# Altium PCB Ubiwatch.PcbDoc
Units mil, origin at the board's own origin, x right, y up, seen from the top; angles counter-clockwise.
Board outline 3149.61 x 3149.61 mil, 4 copper layers (Top Layer, GND, PWR, Bottom Layer), stack 23.756 mil thick; 69 components, 42 nets, 303 pads, 0 vias.
Unrouted connection lines stored in the file: 189.
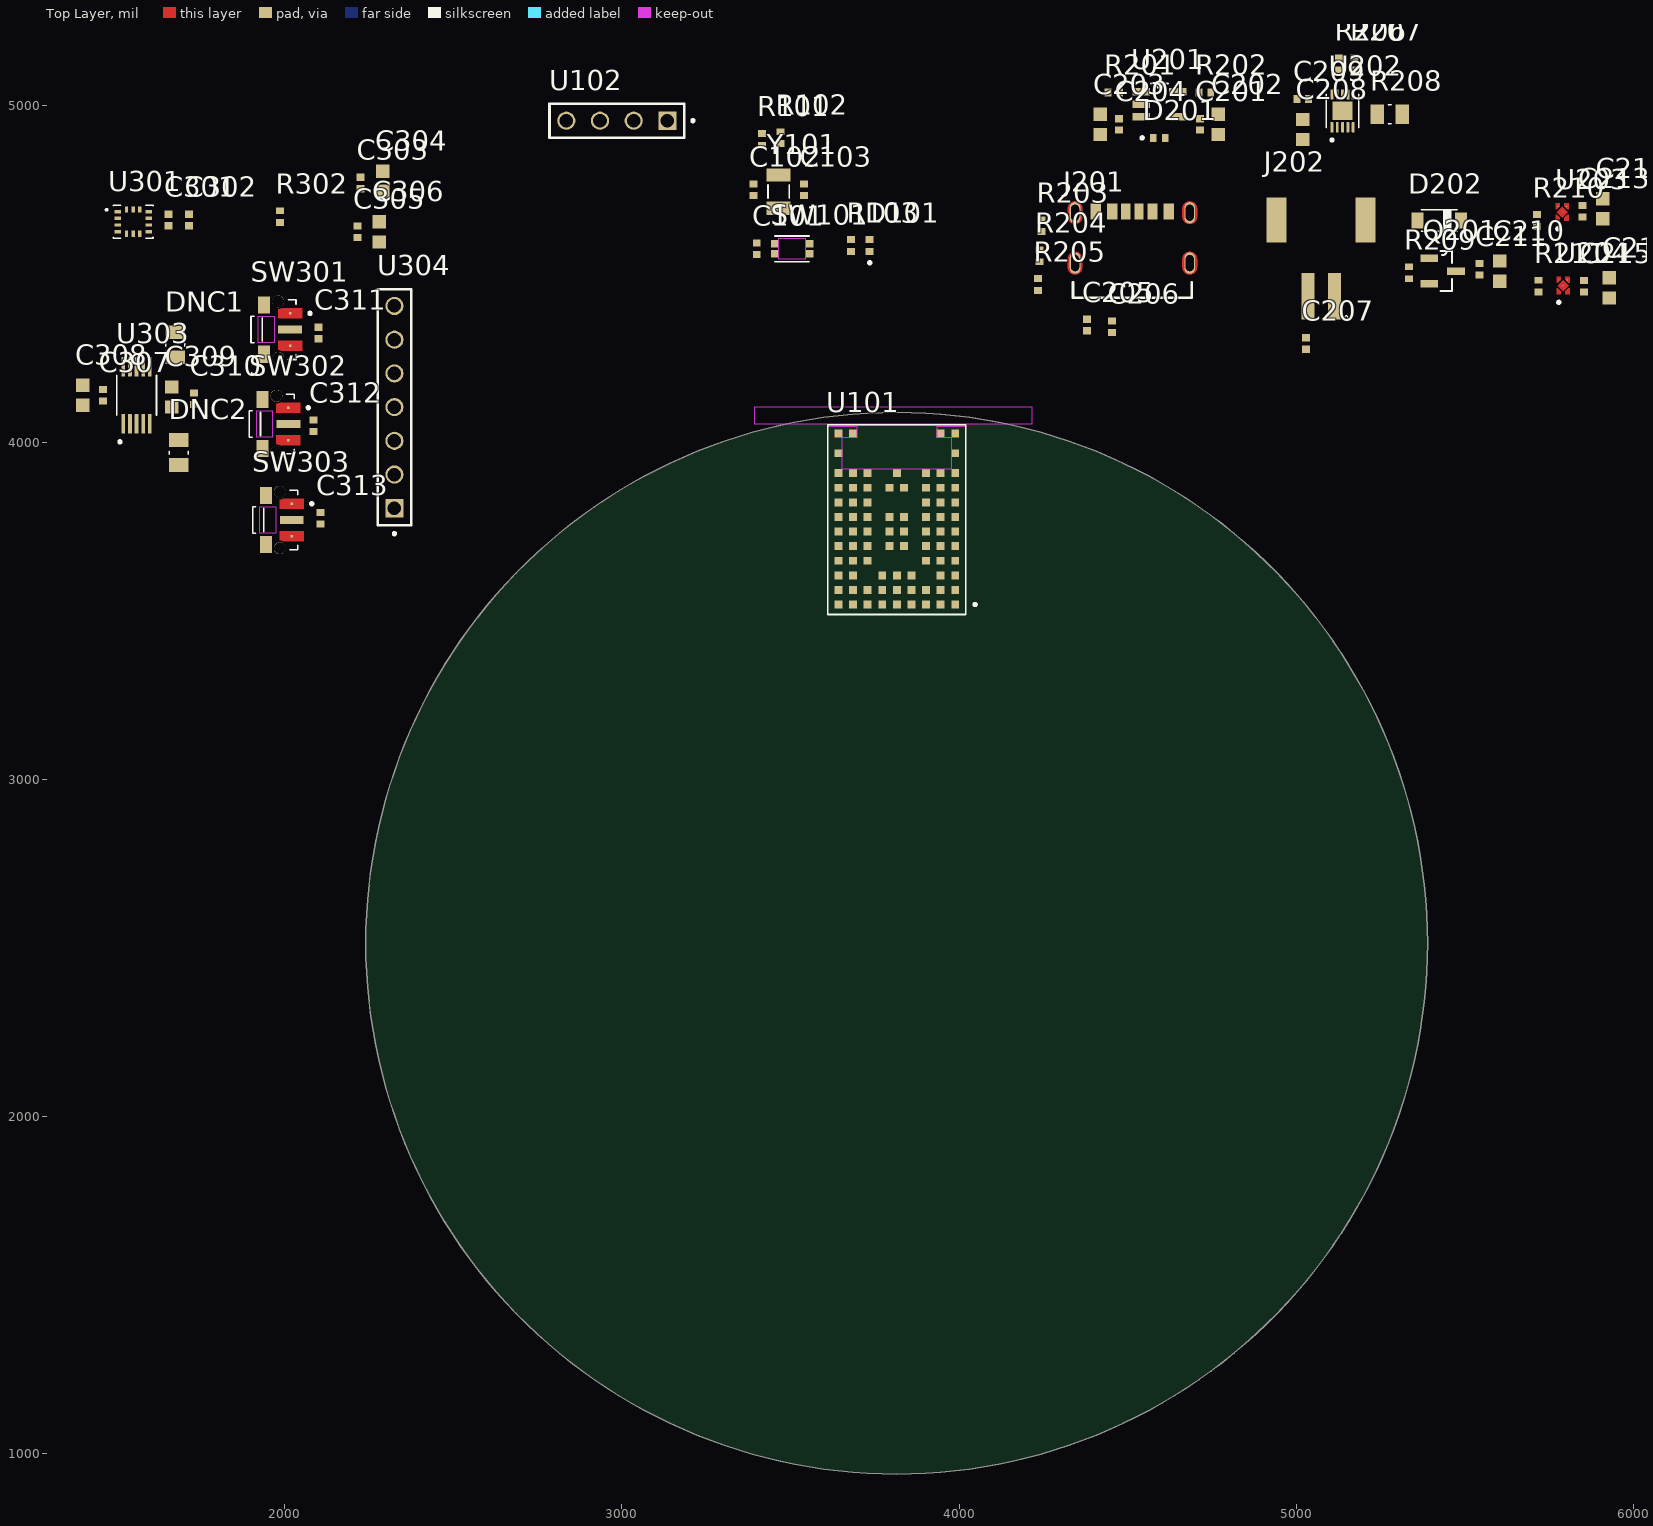
[diagram p0: Top Layer view]
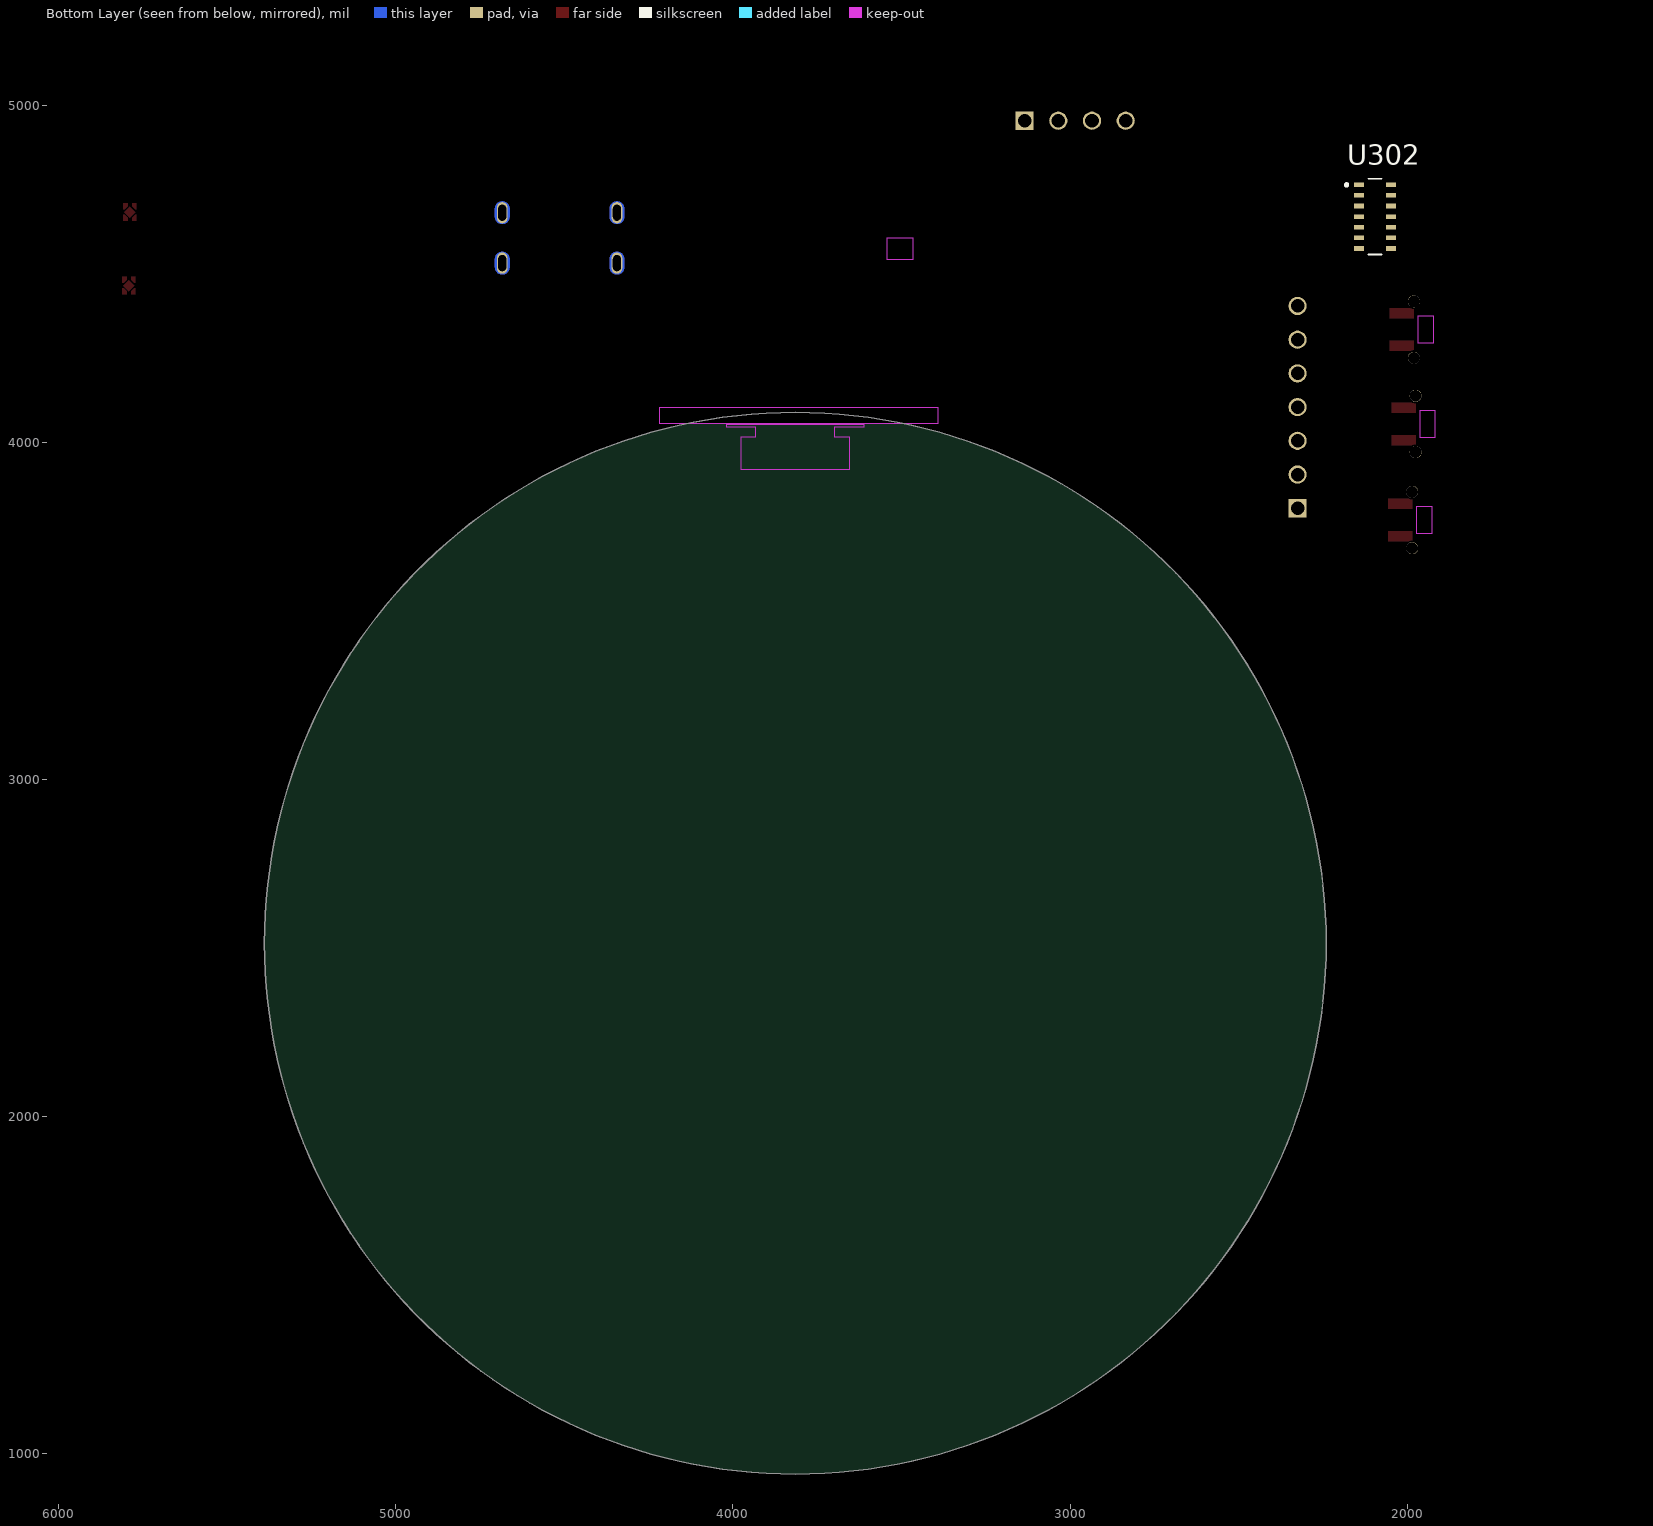
[diagram p1: Bottom Layer view, seen from below]
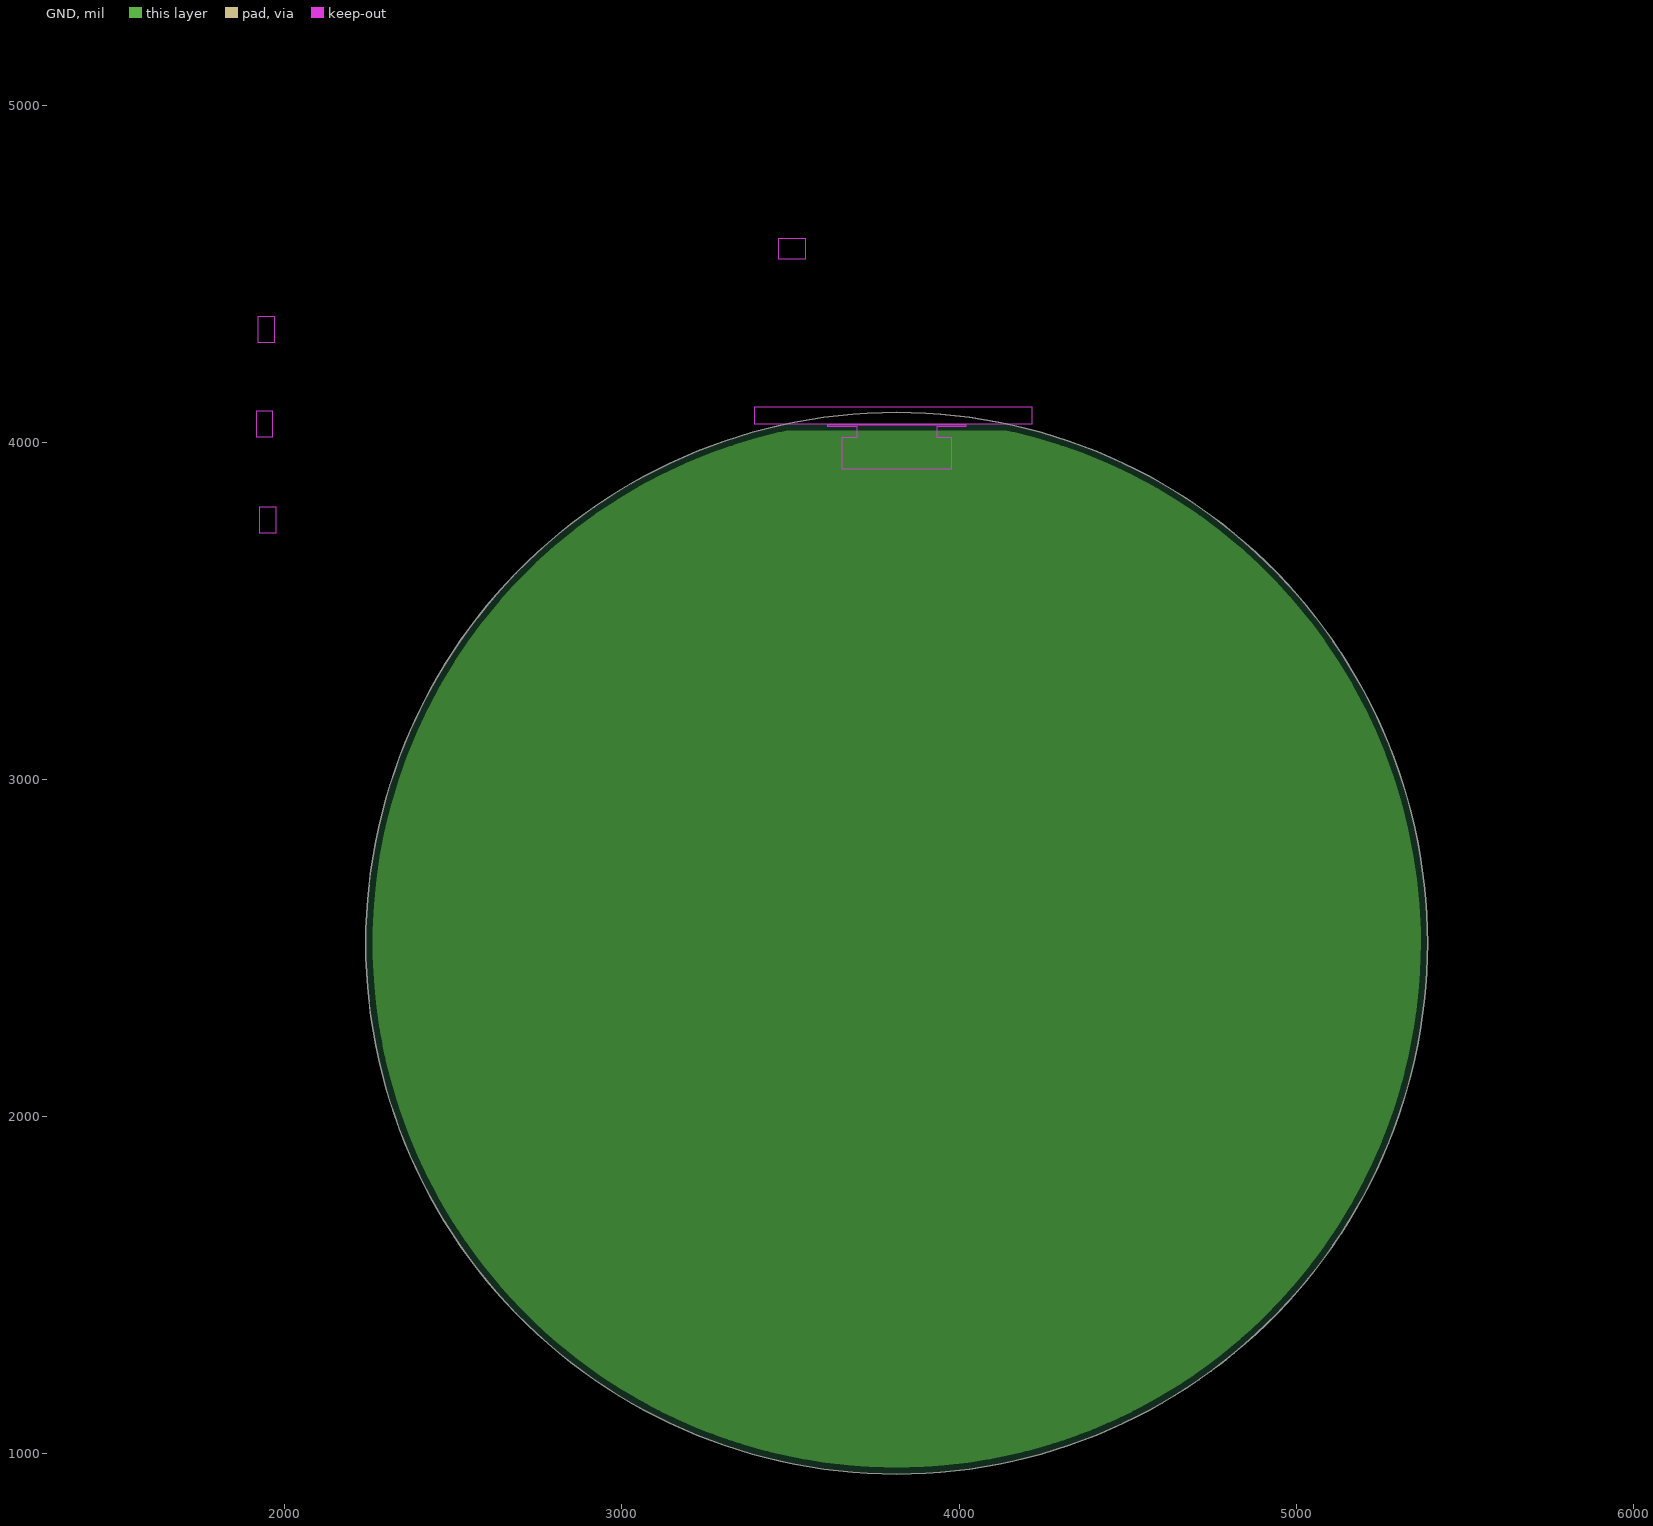
[diagram p2: GND, clearances drawn from the general rule]
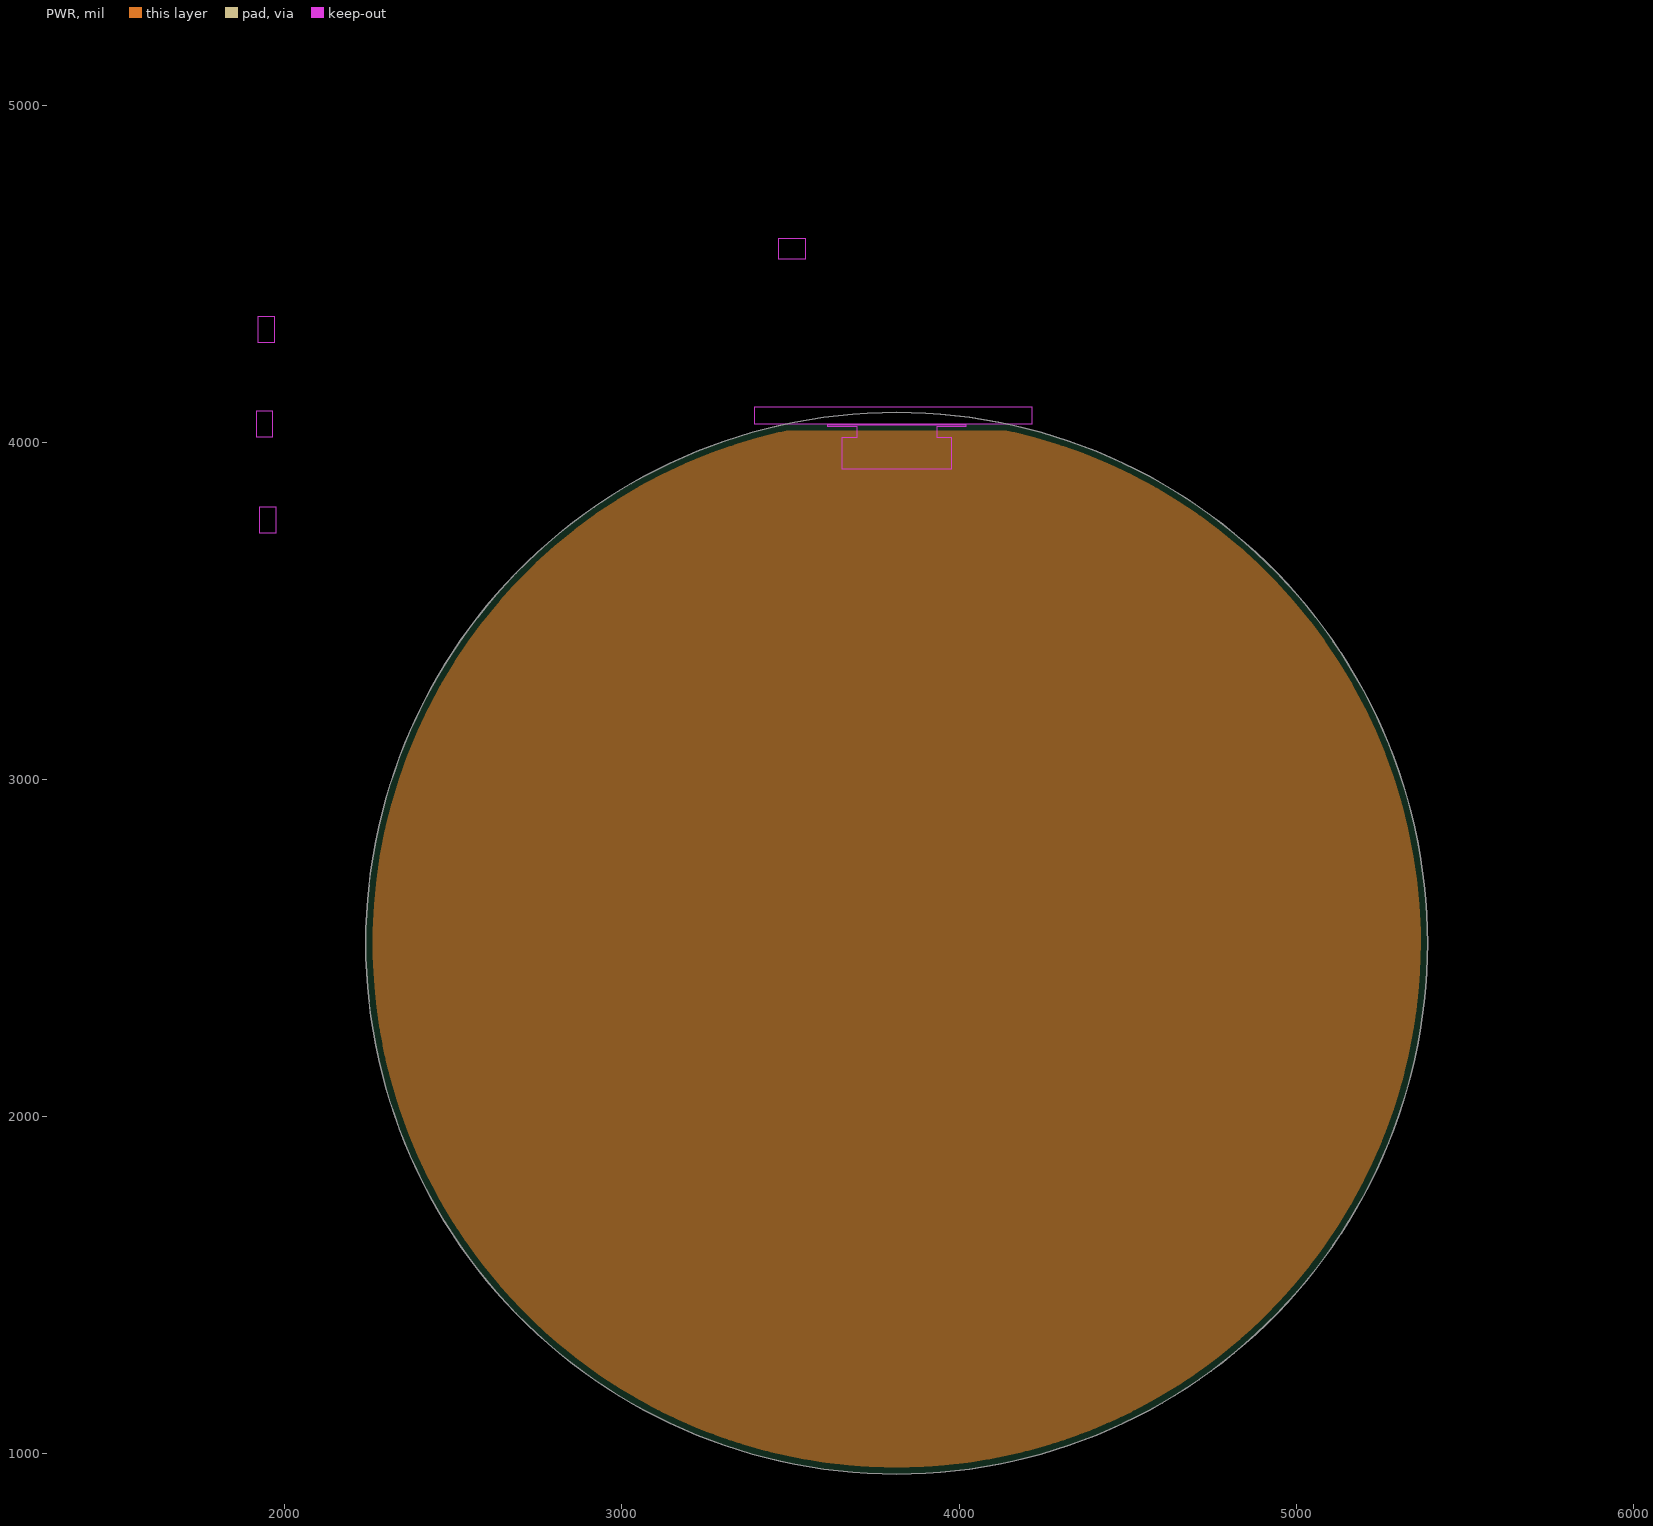
[diagram p3: PWR, clearances drawn from the general rule]

## Layer stack, top to bottom
Top Solder: solder mask 0.4, Solder Resist, Dk 3.5
Top Layer: signal copper 1.4
Dielectric 2: prepreg 2.8, PP-006, Dk 4.1
GND: plane copper 1.378
Dielectric 1: dielectric 12.6, FR-4, Dk 4.8
PWR: plane copper 1.378
Dielectric 3: prepreg 2.8, PP-006, Dk 4.1
Bottom Layer: signal copper 1.4
Bottom Solder: solder mask 0.4, Solder Resist, Dk 3.5

## Board outline
2240.2,2515 ccw(c3815,2515) 3815,940.2 ccw(c3815,2515) 5389.8,2515 ccw(c3815,2515) 3815,4089.8 ccw(c3815,2515)
cut-out: 3392.2,4055.73 4217.29,4055.73 4217.29,4104.45 3392.36,4104.45
board region "Layer Stack Region 1": 2240.2,2515 2240.2,2476.34 2243.99,2399.12 2251.57,2322.17 2262.91,2245.69 2278,2169.85 2296.78,2094.85 2319.23,2020.86 2345.28,1948.07 2374.87,1876.63 2407.92,1806.74 2444.37,1738.55 2484.12,1672.23 2527.08,1607.94 2573.14,1545.84 2622.19,1486.07 2674.11,1428.78 2728.78,1374.11 2786.07,1322.19 2845.84,1273.14 2907.94,1227.08 2972.23,1184.12 3038.55,1144.37 3106.74,1107.92 3176.63,1074.87 3248.07,1045.28 3320.86,1019.23 3394.85,996.78 3469.85,978 3545.69,962.91 3622.17,951.57 3699.12,943.99 3776.34,940.2 3815,940.2 3853.66,940.2 3930.88,943.99 4007.83,951.57 4084.31,962.91 4160.15,978 4235.15,996.78 4309.14,1019.23 4381.93,1045.28 4453.37,1074.87 4523.26,1107.92 4591.45,1144.37 4657.77,1184.12 4722.06,1227.08 4784.16,1273.14 4843.93,1322.19 4901.22,1374.11 4955.89,1428.78 5007.81,1486.07 5056.86,1545.84 5102.92,1607.94 5145.88,1672.23 5185.63,1738.55 5222.08,1806.74 5255.13,1876.63 5284.72,1948.07 5310.77,2020.86 5333.22,2094.85 5352,2169.85 5367.09,2245.69 5378.43,2322.17 5386.01,2399.12 5389.8,2476.34 5389.8,2515 5389.8,2553.66 5386.01,2630.88 5378.43,2707.83 5367.09,2784.31 5352,2860.15 5333.22,2935.15 5310.77,3009.14 5284.72,3081.93 5255.13,3153.37 5222.08,3223.26 5185.63,3291.45 5145.88,3357.77 5102.92,3422.06 5056.86,3484.16 5007.81,3543.93 4955.89,3601.22 4901.22,3655.89 4843.93,3707.81 4784.16,3756.86 4722.06,3802.92 4657.77,3845.88 4591.45,3885.63 4523.26,3922.08 4453.37,3955.13 4381.93,3984.72 4309.14,4010.77 4235.15,4033.22 4160.15,4052 4084.31,4067.09 4007.83,4078.43 3930.88,4086.01 3853.66,4089.8 3815,4089.8 3776.34,4089.8 3699.12,4086.01 3622.17,4078.43 3545.69,4067.09 3469.85,4052 3394.85,4033.22 3320.86,4010.77 3248.07,3984.72 3176.63,3955.13 3106.74,3922.08 3038.55,3885.63 2972.23,3845.88 2907.94,3802.92 2845.84,3756.86 2786.07,3707.81 2728.78,3655.89 2674.11,3601.22 2622.19,3543.93 2573.14,3484.16 2527.08,3422.06 2484.12,3357.77 2444.37,3291.45 2407.92,3223.26 2374.87,3153.37 2345.28,3081.93 2319.23,3009.14 2296.78,2935.15 2278,2860.15 2262.91,2784.31 2251.57,2707.83 2243.99,2630.88 2240.2,2553.66
board region "Default Layer Stack Region": 2240.2,2515 2240.2,2476.34 2243.99,2399.12 2251.57,2322.17 2262.91,2245.69 2278,2169.85 2296.79,2094.85 2319.23,2020.86 2345.28,1948.07 2374.87,1876.63 2407.92,1806.74 2444.37,1738.55 2484.12,1672.23 2527.08,1607.94 2573.14,1545.84 2622.19,1486.07 2674.11,1428.78 2728.78,1374.11 2786.07,1322.19 2845.84,1273.14 2907.94,1227.08 2972.23,1184.12 3038.55,1144.37 3106.74,1107.92 3176.63,1074.87 3248.07,1045.28 3320.86,1019.23 3394.85,996.79 3469.85,978 3545.69,962.91 3622.17,951.57 3699.12,943.99 3776.34,940.2 3815,940.2 3853.66,940.2 3930.88,943.99 4007.83,951.57 4084.31,962.91 4160.15,978 4235.15,996.79 4309.14,1019.23 4381.93,1045.28 4453.37,1074.87 4523.26,1107.92 4591.45,1144.37 4657.77,1184.12 4722.06,1227.08 4784.16,1273.14 4843.93,1322.19 4901.22,1374.11 4955.89,1428.78 5007.81,1486.07 5056.86,1545.84 5102.92,1607.94 5145.88,1672.23 5185.63,1738.55 5222.08,1806.74 5255.13,1876.63 5284.72,1948.07 5310.77,2020.86 5333.21,2094.85 5352,2169.85 5367.09,2245.69 5378.43,2322.17 5386.01,2399.12 5389.8,2476.34 5389.8,2515 5389.8,2553.66 5386.01,2630.88 5378.43,2707.83 5367.09,2784.31 5352,2860.15 5333.21,2935.15 5310.77,3009.14 5284.72,3081.93 5255.13,3153.37 5222.08,3223.26 5185.63,3291.45 5145.88,3357.77 5102.92,3422.06 5056.86,3484.16 5007.81,3543.93 4955.89,3601.22 4901.22,3655.89 4843.93,3707.81 4784.16,3756.86 4722.06,3802.92 4657.77,3845.88 4591.45,3885.63 4523.26,3922.08 4453.37,3955.13 4381.93,3984.72 4309.14,4010.77 4235.15,4033.21 4160.15,4052 4084.31,4067.09 4007.83,4078.43 3930.88,4086.01 3853.66,4089.8 3815,4089.8 3776.34,4089.8 3699.12,4086.01 3622.17,4078.43 3545.69,4067.09 3469.85,4052 3394.85,4033.21 3320.86,4010.77 3248.07,3984.72 3176.63,3955.13 3106.74,3922.08 3038.55,3885.63 2972.23,3845.88 2907.94,3802.92 2845.84,3756.86 2786.07,3707.81 2728.78,3655.89 2674.11,3601.22 2622.19,3543.93 2573.14,3484.16 2527.08,3422.06 2484.12,3357.77 2444.37,3291.45 2407.92,3223.26 2374.87,3153.37 2345.28,3081.93 2319.23,3009.14 2296.79,2935.15 2278,2860.14 2262.91,2784.31 2251.57,2707.83 2243.99,2630.88 2240.2,2553.66

## Design rules (kind name [scope] priority, off if disabled: settings)
BoardOutlineClearance [All] p1: gap=7.87 ignorepadtopadclearanceinfootprint=FALSE
Clearance [All] p1: gap=4 ignorepadtopadclearanceinfootprint=FALSE except(5: Arc-Via Track-Via SMDPad-Via THPad-Via Via-Via Via-Fill Via-Poly Via-Region Via-Text; 9.84: Arc-Hole Track-Hole SMDPad-Hole THPad-Hole Via-Hole Fill-Hole Poly-Hole Region-Hole Text-Hole)
ComponentClearance [All] p1: gap=4 collisioncheckmode=3 verticalgap=4 showdistances=TRUE
DiffPairsRouting [All] p1: maxlimit=4 minlimit=4 mostfreqgap=4 toplayer_minwidth=4 toplayer_maxwidth=71497.94 toplayer_prefwidth=4 bottomlayer_minwidth=4 bottomlayer_maxwidth=71497.94 bottomlayer_prefwidth=4 maxuncoupledlength=500
Height [All] p1: minheight=0 maxheight=71497.94 prefheight=500
HoleSize [All] p1: absolutevalues=TRUE maxlimit=248.03 minlimit=7.87 maxpercent=80.000 minpercent=20.000
HoleToHoleClearance [All] p1: gap=9.84 allowstackedmicrovias=FALSE
MinimumAnnularRing [All] p1: minimumring=3
MinimumSolderMaskSliver [All] p1: minsoldermaskwidth=0
PlaneClearance [All] p1: clearance=4
PlaneConnect PlaneConnectPowerPads [InPadClass('PowerPads')] p1: planeconnectstyle=Direct reliefexpansion=20 reliefentries=4 reliefconductorwidth=10 reliefairgap=10
PlaneConnect [All] p2: pad.planeconnectstyle=Relief pad.reliefexpansion=11.81 pad.reliefentries=4 pad.reliefconductorwidth=4 pad.reliefairgap=4 via.planeconnectstyle=Direct via.reliefexpansion=11.81 via.reliefentries=4 via.reliefconductorwidth=5 via.reliefairgap=5
PolygonConnect PolygonConnectPowerPads [All vs (InPadClass('PowerPads'))] p1: connectstyle=Direct reliefconductorwidth=10 reliefentries=4 polygonreliefangle="90 Angle" airgapwidth=10
PolygonConnect [All] p2: thpad.connectstyle=Relief thpad.reliefconductorwidth=4 thpad.reliefentries=4 thpad.polygonreliefangle="90 Angle" thpad.airgapwidth=4 smdpad.connectstyle=Relief smdpad.reliefconductorwidth=4 smdpad.reliefentries=4 smdpad.polygonreliefangle="90 Angle" smdpad.airgapwidth=4 via.connectstyle=Direct via.reliefconductorwidth=5 via.reliefentries=4 via.polygonreliefangle="90 Angle" via.airgapwidth=5
RoomDefinition NORA_Escape [InComponentClass('Room Definition1')] p1: confinementstyle=ConfineIn formatcopy=TRUE lockcomponents=FALSE outline 3533.53,3475.45 3533.53,4234.39 4059.78,4234.39 4059.78,3475.45
RoutingVias [All] p1: holewidth=7.87 width=17.72 viastyle="Through Hole" minholewidth=7.87 minwidth=17.72 maxholewidth=248.03 maxwidth=257.87
SilkToSilkClearance [All] p1: silktosilkclearance=0
SilkToSolderMaskClearance [IsPad] p1: minsilkscreentomaskgap=4 clearancetoexposedcopper=TRUE
SolderMaskExpansion [All] p1: expansion=2.95 istentingtop=FALSE
SupplyNets "Schematic Supply Nets_5" [InNet('VBAT')] p1: voltage=0.000
SupplyNets "Schematic Supply Nets_4" [InNet('GND')] p2: voltage=0.000
SupplyNets "Schematic Supply Nets_3" [InNet('USBC')] p3: voltage=0.000
SupplyNets "Schematic Supply Nets_2" [InNet('1.8V')] p4: voltage=0.000
SupplyNets "Schematic Supply Nets_1" [InNet('3.3V')] p5: voltage=0.000
Width Width_Escape [WithinRoom('NORA_Escape')] p1: maxlimit=5 minlimit=4 preferedwidth=4 minimp=50.000000 maximp=50.000000 favimp=50.000000
Width Width_Battery [InNetClass('BATT')] p2: maxlimit=25 minlimit=15 preferedwidth=20 minimp=50.000000 maximp=50.000000 favimp=50.000000
Width Width_Power [InNetClass('PWR')] p3: maxlimit=20 minlimit=10 preferedwidth=12 minimp=50.000000 maximp=50.000000 favimp=50.000000
Width Width_Signal [All] p4: maxlimit=8 minlimit=5 preferedwidth=6 minimp=50.000000 maximp=50.000000 favimp=50.000000
Width [All] p5: maxlimit=10 minlimit=10 preferedwidth=10 minimp=50.000000 maximp=50.000000 favimp=50.000000
20 further rules are at their usual default settings.

## Classes and differential pairs
component class "Room Definition1": U101
net class SIG: 32.768-1 32.768-2 GND MCULED NetC206_2 NetC208_2 NetC309_1 NetC310_1 NetC310_2 NetC311_1 NetC312_1 NetC313_1 NetD101_A NetD201_K NetJ201_A5 NetJ201_B5 NetR201_2 NetR202_1 NetR206_2 NetR207_2 NetR210_1 NetR211_1 NetR302_1 NetU101_D1 NetU101_D8 NetU101_E8 NetU101_F2 NetU101_H7 NetU101_H8 NetU101_J8 NetU101_J9 nRESET SCL SDA SWDCLK SWDIO VNEG
net class PWR: 1.8V 3.3V
net class BATT: USBC VBAT VSYS
component class U_Power: C201 C202 C203 C204 C205 C206 C207 C208 C209 C210 C211 C212 C213 C214 C215 D201 J201 J202 Q201 R201 R202 R203 R204 R205 R206 R207 R208 R209 R210 R211 U201 U202 U203 U204
component class U_Peripherals: C301 C302 C303 C304 C305 C306 C307 C308 C309 C310 C311 C312 C313 DNC1 DNC2 R302 SW301 SW302 SW303 U301 U302 U303 U304
component class U_Microcontroller: C101 C102 C103 D101 R101 R102 R103 SW101 U101 U102 Y101

## Components (designator, comment, footprint, x,y, rotation, side; value= is the part's Value field where it differs from the comment)
C101 "100n" 0402c 3400,4575 r90 top
C102 "18p" 0402c 3390,4750 r90 top
C103 "18p" 0402c 3540,4750 r90 top
C201 "100n" 0402c 4714.29,4944.08 r90 top
C202 "10u" 0603c 4769.29,4944.08 r90 top
C203 "10u" 0603c 4419.29,4944.08 r90 top
C204 "100n" 0402c 4474.29,4944.08 r90 top
C205 "100n" 0402c 4379.29,4349.08 r90 top
C206 "47n" 0402c 4454.29,4344.08 r90 top
C207 "100n" 0402c 5029.29,4294.08 r90 top
C208 "4u7" 0603c 5019.29,4929.08 r90 top
C209 "100n" 0402c 5019.29,5019.08 r180 top
C210 "10u" 0603c 5604.29,4509.08 r90 top
C211 "100n" 0402c 5544.29,4514.08 r90 top
C212 "10u" 0603c 5909.29,4694.08 r90 top
C213 "100n" 0402c 5849.29,4686.09 r90 top
C214 "10u" 0603c 5929.29,4458.97 r90 top
C215 "100n" 0402c 5854.29,4464.08 r90 top
C301 "100n" 0402c 1655.2,4660.47 r90 top
C302 "100n" 0402c 1715.2,4660.47 r90 top
C303 "100n" 0402c 2225.2,4770.47 r90 top
C304 "4u7" 0603c 2290.2,4775.47 r90 top
C305 "100n" 0402c 2215.2,4625.47 r90 top
C306 "10u" 0603c 2280.2,4625.47 r90 top
C307 "1u" 0402c 1460.2,4140.47 r90 top
C308 "10u" 0603c 1400.2,4140.47 r90 top
C309 "1u" 0603c 1665.2,4135.47 r90 top
C310 "100p" 0402c 1730.2,4130.47 r90 top
C311 "100n" 0402c 2100.2,4325.47 r90 top
C312 "100n" 0402c 2085.2,4050.47 r90 top
C313 "100n" 0402c 2105.2,3775.47 r90 top
D101 "LED" .LED 3735,4585 r90 top
D201 "LED" .LED 4594.29,4904.08 r0 top
D202 "MBR0520LT1G" MBR0520LT1G 5429.29,4659.08 r180 top
DNC1 "DNC" 0805r 1675.2,4290.47 r90 top
DNC2 "DNC" 0805r 1685.2,3970.47 r90 top
J201 "USB4125-GF-A" USB4125-GF-A 4514.29,4574.08 r0 top
J202 "S2B-PH-SM4-TB" S2B-PH-SM4-TB 5069.29,4594.08 r0 top
Q201 "DMG3415U-7" DMG3415U-7 5429.29,4509.08 r0 top
R101 "5k1" 0402r 3415,4900 r270 top
R102 "5k1" 0402r 3470,4905 r90 top
R103 "1k" 0402r 3680,4585 r90 top
R201 "1k" 0402r 4459.29,5039.08 r0 top
R202 "5k1" 0402r 4729.29,5039.08 r0 top
R203 "5k1" 0402r 4244.29,4644.08 r270 top
R204 "5k1" 0402r 4239.29,4554.08 r270 top
R205 "1M" 0402r 4234.29,4469.08 r270 top
R206 "10k" 0402r 5127.79,5124.08 r270 top
R207 "10k" 0402r 5172.79,5124.08 r270 top
R208 "10mR" 0805r 5277.79,4974.08 r0 top
R209 "100k" 0402r 5334.29,4504.08 r270 top
R210 "100k" 0402r 5714.29,4659.08 r90 top
R211 "100k" 0402r 5719.29,4464.08 r90 top
R302 "10k" 0402r 1985.2,4670.47 r90 top
SW101 "Button" .Button 3505,4575 r180 top
SW301 "UIButton" TL3340AF160QG 1975.2,4335.47 r270 top
SW302 "UIButton" TL3340AF160QG 1970.2,4055.47 r270 top
SW303 "UIButton" TL3340AF160QG 1980.2,3770.47 r270 top
U101 "NORA-B106" NORA-B106 3795.62,3761.77 r90 top
U102 "4-pin" 4-pin 2985,4955 r180 top
U201 "MCP73832" MCP73832 4594.29,5009.08 r0 top
U202 "MAX17055" MAX17055 5137.79,4984.08 r90 top
U203 "TPS7A0218P" TPS7A0218P 5789.29,4684.08 r90 top
U204 "TPS7A0233P" TPS7A0233P 5792.08,4466.01 r90 top
U301 "BMI270" BMI270 1550.2,4660.47 r0 top
U302 "MAX30102" MAX30102 2095.2,4670.47 r180 bottom
U303 "DRV2605L" DRV2605L 1560.2,4140.47 r90 top
U304 "7-pin" 7-pin 2325.2,4105.47 r90 top
Y101 "32.768kHz" 32.768kHz 3460,4745 r90 top

## Footprints (in the part's own frame and the unit in brackets; to place one, negate y for a bottom-side part, rotate by r counter-clockwise, add the part's x,y. Pads: shape width x height; smd on the part's side, far side on the other; paste and mask are expansions set on the pad)
4-pin [mm]
  rect 1.37x1.37 hole 1.02: 01(-3.81,0)
  round 1.37 hole 1.02: 02(-1.27,0) 03(1.27,0) 04(3.81,0)
  silkscreen extent -5.83,-1.27 5.08,1.27
7-pin [mm]
  rect 1.37x1.37 hole 1.02: 01(-7.62,0)
  round 1.37 hole 1.02: 02(-5.08,0) 03(-2.54,0) 04(0,0) 05(2.54,0) 06(5.08,0) 07(7.62,0)
  silkscreen extent -9.64,-1.27 8.89,1.27
32.768kHz [mm]
  rect 1x1.8 smd: 1(-1.25,-0.127) 2(1.25,-0.127)
  silkscreen extent -0.5,-0.93 0.5,0.67, body extent -1.6,-0.88 1.6,0.62, height 0.9
0402c [mm]
  rect 0.54x0.6 smd: 1(-0.432,0) 2(0.432,0)
  body extent -0.5,-0.25 0.5,0.25, height 0.55
0402r [mm]
  rect 0.51x0.6 smd: 1(-0.445,0) 2(0.445,0)
  body extent -0.5,-0.25 0.5,0.25, height 0.4
0603c [mm]
  rect 1x1.02 smd: 1(-0.759,0) 2(0.759,0)
  body extent -0.8,-0.4 0.8,0.4, height 1
0805r [mm]
  rect 1.04x1.47 smd: 1(-0.94,0) 2(0.94,0)
  silkscreen extent -0.1,-0.72 0.1,0.72, body extent -1,-0.63 1,0.63, height 0.7
.Button [mm]
  rect 0.55x0.55 smd paste-0.05: A1(-1.325,0.375) A2(-1.325,-0.375) B1(1.325,0.375) B2(1.325,-0.375)
  Keep-Out Layer region: 1,-0.802 -1.002,-0.802 -1.002,0.8 1,0.8
  silkscreen extent -1.3,-0.96 1.3,0.96, body extent -1.5,-0.9 1.5,0.9, height 0.63
.LED [mm]
  rect 0.5x0.6 smd: A(0.45,0) K(-0.45,0)
  silkscreen extent -1.4,-0.1 -1.2,0.1, body extent -0.5,-0.3 0.5,0.3, height 0.21
BMI270 [mm]
  rect 0.475x0.25 smd: 1(-1.162,0.623) 2(-1.162,0.123) 3(-1.162,-0.377) 4(-1.162,-0.877) 8(1.162,-0.877) 9(1.162,-0.377) 10(1.162,0.123) 11(1.162,0.623)
  rect 0.25x0.475 smd: 5(-0.5,-1.04) 6(0,-1.04) 7(0.5,-1.04) 12(0.5,0.786) 13(0,0.786) 14(-0.5,0.786)
  silkscreen extent -2.07,-1.38 1.5,1.12, body extent -1.5,-1.38 1.5,1.12, height 0.87
DMG3415U-7 [mil]
  rect 52x22 smd: 1(-35,38) 2(-35,-38) 3(45,0)
  silkscreen extent -1,-59 33,59, body extent -42,-57 52,57, height 45
DRV2605L [mm]
  rrect25% 1.47x0.28 smd paste+0 mask+0.102: 1(-2.15,1) 2(-2.15,0.5) 3(-2.15,0) 4(-2.15,-0.5) 5(-2.15,-1) 6(2.15,-1) 7(2.15,-0.5) 8(2.15,0) 9(2.15,0.5) 10(2.15,1)
  silkscreen extent -3.6,-1.5 1.5,1.5, body extent -2.45,-1.5 2.45,1.5, height 1.1
MAX17055 [mm]
  rrect25% 0.76x0.22 smd: 1(-1.23,0.8) 2(-1.23,0.4) 3(-1.23,0) 4(-1.23,-0.4) 5(-1.23,-0.8) 6(1.23,-0.8) 7(1.23,-0.4) 8(1.23,0) 9(1.23,0.4) 10(1.23,0.8)
  rect 1.4x1.5 smd paste-2: 11(0,0)
  silkscreen extent -2.29,-1.23 1.25,1.23
MAX30102 [mm]
  rect 0.75x0.35 smd: 1(-1.2,2.4) 2(-1.2,1.6) 3(-1.2,0.8) 4(-1.2,0) 5(-1.2,-0.8) 6(-1.2,-1.6) 7(-1.2,-2.4) 8(1.2,-2.4) 9(1.2,-1.6) 10(1.2,-0.8) 11(1.2,0) 12(1.2,0.8) 13(1.2,1.6) 14(1.2,2.4)
  silkscreen extent -2.25,-2.85 0.51,2.85
MBR0520LT1G [mm]
  rect 0.91x1.22 smd: A(1.762,0) C(-1.508,0)
  silkscreen extent -1.22,-0.8 1.48,0.8, body extent -1.71,-0.8 1.97,0.8, height 1.35
MCP73832 [mil]
  rect 52x22 smd: 1(-54,32) 2(-54,-5) 3(-54,-42) 4(54,-42) 5(54,32)
  silkscreen extent -25,44 25,56, body extent -57,-58 57,48, height 57
NORA-B106 [mm]
  rect 0.6x0.6 smd paste+0 mask+0.102: A1(-6.146,-4.908) A2(-6.146,-3.808) A3(-6.146,-2.708) A4(-6.146,-1.608) A5(-6.146,-0.508) A6(-6.146,0.592) A7(-6.146,1.692) A8(-6.146,2.792) A9(-6.146,3.892) B1(-5.046,-4.908) B2(-5.046,-3.808) B3(-5.046,-2.708) B4(-5.046,-1.608) B5(-5.046,-0.508) B6(-5.046,0.592) B7(-5.046,1.692) B8(-5.046,2.792) B9(-5.046,3.892) C1(-3.946,-4.908) C2(-3.946,-3.808) C4(-3.946,-1.608) C5(-3.946,-0.508) C6(-3.946,0.592) C8(-3.946,2.792) C9(-3.946,3.892) D1(-2.846,-4.908) D2(-2.846,-3.808) D3(-2.846,-2.708) D7(-2.846,1.692) D8(-2.846,2.792) D9(-2.846,3.892) E1(-1.746,-4.908) E2(-1.746,-3.808) E3(-1.746,-2.708) E4(-1.746,-1.058) E5(-1.746,0.042) E7(-1.746,1.692) E8(-1.746,2.792) E9(-1.746,3.892) F1(-0.646,-4.908) F2(-0.646,-3.808) F3(-0.646,-2.708) F4(-0.646,-1.058) F5(-0.646,0.042) F7(-0.646,1.692) F8(-0.646,2.792) F9(-0.646,3.892) G1(0.454,-4.908) G2(0.454,-3.808) G3(0.454,-2.708) G4(0.454,-1.058) G5(0.454,0.042) G7(0.454,1.692) G8(0.454,2.792) G9(0.454,3.892) H1(1.554,-4.908) H2(1.554,-3.808) H3(1.554,-2.708) H7(1.554,1.692) H8(1.554,2.792) H9(1.554,3.892) J1(2.654,-4.908) J2(2.654,-3.808) J3(2.654,-2.708) J4(2.654,-1.058) J5(2.654,0.042) J7(2.654,1.692) J8(2.654,2.792) J9(2.654,3.892) K1(3.754,-4.908) K2(3.754,-3.808) K3(3.754,-2.708) K5(3.754,-0.508) K7(3.754,1.692) K8(3.754,2.792) K9(3.754,3.892) L1(5.254,-4.908) L9(5.254,3.892) M1(6.754,-4.908) M2(6.754,-3.808) M8(6.754,2.792) M9(6.754,3.892)
  Keep-Out Layer region: 7.404,-5.708 7.254,-5.708 7.254,-3.508 6.454,-3.508 6.454,-4.608 4.054,-4.608 4.054,3.592 6.454,3.592 6.454,2.492 7.254,2.492 7.254,4.692 7.404,4.692
  Keep-Out Layer region: 7.404,-5.708 7.254,-5.708 7.254,-3.508 6.454,-3.508 6.454,-4.608 4.054,-4.608 4.054,3.592 6.454,3.592 6.454,2.492 7.254,2.492 7.254,4.692 7.404,4.692
  silkscreen extent -6.9,-6.51 7.4,4.69, body extent -6.9,-5.71 7.4,4.69, height 1.8
S2B-PH-SM4-TB [mm]
  rect 1x3.5 smd: 1(1.127,-4.064) 2(-0.873,-4.064)
  rect 1.5x3.4 smd: P1(3.477,1.686) P2(-3.223,1.686)
  silkscreen extent 1.9,-5.79 2.15,-5.54, body extent -3.82,-4.06 4.08,4.54, height 5.5
TL3340AF160QG [mm]
  rect 0.2x0.2 smd paste-1 mask+0: 1(-1.225,1.027) 3(1.225,1.027)
  rect 0.6x1.8 smd: 2(0,1.027)
  rect 1.3x0.9 smd: S1(-1.85,-0.923) S2(1.85,-0.923)
  round 0.9 hole 0.9 unplated: ""(-2.125,0.127) ""(2.125,0.127)
  Top Layer region: -0.85,0.127 -1.525,0.127 -1.525,0.136 -1.525,0.154 -1.526,0.172 -1.529,0.19 -1.53,0.198 -1.53,0.198 -1.531,0.207 -1.533,0.225 -1.536,0.243 -1.54,0.261 -1.543,0.27 -1.545,0.28 -1.551,0.302 -1.557,0.323 -1.565,0.344 -1.569,0.354 -1.572,0.363 -1.579,0.379 -1.587,0.395 -1.595,0.41 -1.6,0.417 -1.6,0.427 -1.6,1.927 -0.85,1.927
  Top Layer region: 1.6,0.427 1.6,0.417 1.595,0.41 1.587,0.395 1.579,0.379 1.572,0.363 1.569,0.354 1.565,0.344 1.557,0.323 1.551,0.302 1.545,0.28 1.543,0.27 1.54,0.261 1.536,0.243 1.533,0.225 1.531,0.207 1.53,0.198 1.53,0.198 1.529,0.19 1.526,0.172 1.525,0.154 1.525,0.136 1.525,0.127 0.85,0.127 0.85,1.927 1.6,1.927
  Keep-Out Layer region: 1,-1.373 -1,-1.373 -1,-0.173 1,-0.173
  silkscreen extent -2.25,-1.92 2.25,2.63, body extent -2.25,-1.92 2.25,1.74, height 3.3
TPS7A0218P [mm]
  rect 0.05x0.05 smd paste-1 mask+0: 1(-0.43,0.325) 2(-0.43,-0.325) 3(0.43,-0.325) 4(0.43,0.325) 5(0,0)
  Top Layer region: 0.41,0 0,-0.41 -0.41,0 0,0.41
  Top Layer region: -0.2,-0.4 -0.2,-0.48 -0.66,-0.48 -0.66,-0.17 -0.43,-0.17
  Top Layer region: -0.2,0.4 -0.43,0.17 -0.66,0.17 -0.66,0.48 -0.2,0.48
  Top Layer region: 0.66,-0.48 0.2,-0.48 0.2,-0.4 0.43,-0.17 0.66,-0.17
  Top Layer region: 0.66,0.17 0.43,0.17 0.2,0.4 0.2,0.48 0.66,0.48
  silkscreen extent -1.36,0.23 -1.16,0.42, body extent -0.5,-0.5 0.5,0.5, height 0.4
TPS7A0233P [mm]
  rect 0.05x0.05 smd paste-1 mask+0: 1(-0.43,0.325) 2(-0.43,-0.325) 3(0.43,-0.325) 4(0.43,0.325) 5(0,0)
  Top Layer region: 0.41,0 0,-0.41 -0.41,0 0,0.41
  Top Layer region: -0.2,-0.4 -0.2,-0.48 -0.66,-0.48 -0.66,-0.17 -0.43,-0.17
  Top Layer region: -0.2,0.4 -0.43,0.17 -0.66,0.17 -0.66,0.48 -0.2,0.48
  Top Layer region: 0.66,-0.48 0.2,-0.48 0.2,-0.4 0.43,-0.17 0.66,-0.17
  Top Layer region: 0.66,0.17 0.43,0.17 0.2,0.4 0.2,0.48 0.66,0.48
  silkscreen extent -1.36,0.23 -1.16,0.42, body extent -0.5,-0.5 0.5,0.5, height 0.4
USB4125-GF-A [mm]
  rect 0.7x1.2 smd: A5(-0.5,2.826) B5(0.5,2.826)
  rect 0.76x1.2 smd: A9(1.52,2.826) B9(-1.52,2.826)
  rect 0.8x1.2 smd: A12(2.75,2.826) B12(-2.75,2.826)
  oval 0.8x1.6 hole 0.6 slot 1.2 at 90 deg mask+0: S1(-4.32,2.746) S2(4.32,2.746) S3(-4.32,-1.054) S4(4.32,-1.054)
  Top Layer region: 4.349,3.595 4.377,3.593 4.406,3.589 4.434,3.584 4.462,3.577 4.49,3.569 4.517,3.559 4.544,3.548 4.57,3.536 4.595,3.522 4.62,3.507 4.643,3.491 4.666,3.473 4.688,3.455 4.709,3.435 4.729,3.414 4.747,3.392 4.765,3.369 4.781,3.346 4.796,3.321 4.81,3.296 4.822,3.27 4.833,3.243 4.843,3.216 4.851,3.188 4.858,3.16 4.863,3.132 4.867,3.103 4.869,3.075 4.87,3.046 4.87,2.446 4.869,2.417 4.867,2.389 4.863,2.36 4.858,2.332 4.851,2.304 4.843,2.276 4.833,2.249 4.822,2.222 4.81,2.196 4.796,2.171 4.781,2.146 4.765,2.123 4.747,2.1 4.729,2.078 4.709,2.057 4.688,2.037 4.666,2.019 4.643,2.001 4.62,1.985 4.595,1.97 4.57,1.956 4.544,1.944 4.517,1.933 4.49,1.923 4.462,1.915 4.434,1.908 4.406,1.903 4.377,1.899 4.349,1.897 4.32,1.896 4.291,1.897 4.263,1.899 4.234,1.903 4.206,1.908 4.178,1.915 4.15,1.923 4.123,1.933 4.096,1.944 4.07,1.956 4.045,1.97 4.02,1.985 3.997,2.001 3.974,2.019 3.952,2.037 3.931,2.057 3.911,2.078 3.893,2.1 3.875,2.123 3.859,2.146 3.844,2.171 3.83,2.196 3.818,2.222 3.807,2.249 3.797,2.276 3.789,2.304 3.782,2.332 3.777,2.36 3.773,2.389 3.771,2.417 3.77,2.446 3.77,3.046 3.771,3.075 3.773,3.103 3.777,3.132 3.782,3.16 3.789,3.188 3.797,3.216 3.807,3.243 3.818,3.27 3.83,3.296 3.844,3.321 3.859,3.346 3.875,3.369 3.893,3.392 3.911,3.414 3.931,3.435 3.952,3.455 3.974,3.473 3.997,3.491 4.02,3.507 4.045,3.522 4.07,3.536 4.096,3.548 4.123,3.559 4.15,3.569 4.178,3.577 4.206,3.584 4.234,3.589 4.263,3.593 4.291,3.595 4.32,3.596
  Top Layer region: -4.291,3.595 -4.263,3.593 -4.234,3.589 -4.206,3.584 -4.178,3.577 -4.15,3.569 -4.123,3.559 -4.096,3.548 -4.07,3.536 -4.045,3.522 -4.02,3.507 -3.997,3.491 -3.974,3.473 -3.952,3.455 -3.931,3.435 -3.911,3.414 -3.893,3.392 -3.875,3.369 -3.859,3.346 -3.844,3.321 -3.83,3.296 -3.818,3.27 -3.807,3.243 -3.797,3.216 -3.789,3.188 -3.782,3.16 -3.777,3.132 -3.773,3.103 -3.771,3.075 -3.77,3.046 -3.77,2.446 -3.771,2.417 -3.773,2.389 -3.777,2.36 -3.782,2.332 -3.789,2.304 -3.797,2.276 -3.807,2.249 -3.818,2.222 -3.83,2.196 -3.844,2.171 -3.859,2.146 -3.875,2.123 -3.893,2.1 -3.911,2.078 -3.931,2.057 -3.952,2.037 -3.974,2.019 -3.997,2.001 -4.02,1.985 -4.045,1.97 -4.07,1.956 -4.096,1.944 -4.123,1.933 -4.15,1.923 -4.178,1.915 -4.206,1.908 -4.234,1.903 -4.263,1.899 -4.291,1.897 -4.32,1.896 -4.349,1.897 -4.377,1.899 -4.406,1.903 -4.434,1.908 -4.462,1.915 -4.49,1.923 -4.517,1.933 -4.544,1.944 -4.57,1.956 -4.595,1.97 -4.62,1.985 -4.643,2.001 -4.666,2.019 -4.688,2.037 -4.709,2.057 -4.729,2.078 -4.747,2.1 -4.765,2.123 -4.781,2.146 -4.796,2.171 -4.81,2.196 -4.822,2.222 -4.833,2.249 -4.843,2.276 -4.851,2.304 -4.858,2.332 -4.863,2.36 -4.867,2.389 -4.869,2.417 -4.87,2.446 -4.87,3.046 -4.869,3.075 -4.867,3.103 -4.863,3.132 -4.858,3.16 -4.851,3.188 -4.843,3.216 -4.833,3.243 -4.822,3.27 -4.81,3.296 -4.796,3.321 -4.781,3.346 -4.765,3.369 -4.747,3.392 -4.729,3.414 -4.709,3.435 -4.688,3.455 -4.666,3.473 -4.643,3.491 -4.62,3.507 -4.595,3.522 -4.57,3.536 -4.544,3.548 -4.517,3.559 -4.49,3.569 -4.462,3.577 -4.434,3.584 -4.406,3.589 -4.377,3.593 -4.349,3.595 -4.32,3.596
  Top Layer region: 4.349,-0.205 4.377,-0.207 4.406,-0.211 4.434,-0.216 4.462,-0.223 4.49,-0.231 4.517,-0.241 4.544,-0.252 4.57,-0.264 4.595,-0.278 4.62,-0.293 4.643,-0.309 4.666,-0.327 4.688,-0.345 4.709,-0.365 4.729,-0.386 4.747,-0.408 4.765,-0.431 4.781,-0.454 4.796,-0.479 4.81,-0.504 4.822,-0.53 4.833,-0.557 4.843,-0.584 4.851,-0.612 4.858,-0.64 4.863,-0.668 4.867,-0.697 4.869,-0.725 4.87,-0.754 4.87,-1.354 4.869,-1.383 4.867,-1.411 4.863,-1.44 4.858,-1.468 4.851,-1.496 4.843,-1.524 4.833,-1.551 4.822,-1.578 4.81,-1.604 4.796,-1.629 4.781,-1.654 4.765,-1.677 4.747,-1.7 4.729,-1.722 4.709,-1.743 4.688,-1.763 4.666,-1.781 4.643,-1.799 4.62,-1.815 4.595,-1.83 4.57,-1.844 4.544,-1.856 4.517,-1.867 4.49,-1.877 4.462,-1.885 4.434,-1.892 4.406,-1.897 4.377,-1.901 4.349,-1.903 4.32,-1.904 4.291,-1.903 4.263,-1.901 4.234,-1.897 4.206,-1.892 4.178,-1.885 4.15,-1.877 4.123,-1.867 4.096,-1.856 4.07,-1.844 4.045,-1.83 4.02,-1.815 3.997,-1.799 3.974,-1.781 3.952,-1.763 3.931,-1.743 3.911,-1.722 3.893,-1.7 3.875,-1.677 3.859,-1.654 3.844,-1.629 3.83,-1.604 3.818,-1.578 3.807,-1.551 3.797,-1.524 3.789,-1.496 3.782,-1.468 3.777,-1.44 3.773,-1.411 3.771,-1.383 3.77,-1.354 3.77,-0.754 3.771,-0.725 3.773,-0.697 3.777,-0.668 3.782,-0.64 3.789,-0.612 3.797,-0.584 3.807,-0.557 3.818,-0.53 3.83,-0.504 3.844,-0.479 3.859,-0.454 3.875,-0.431 3.893,-0.408 3.911,-0.386 3.931,-0.365 3.952,-0.345 3.974,-0.327 3.997,-0.309 4.02,-0.293 4.045,-0.278 4.07,-0.264 4.096,-0.252 4.123,-0.241 4.15,-0.231 4.178,-0.223 4.206,-0.216 4.234,-0.211 4.263,-0.207 4.291,-0.205 4.32,-0.204
  Top Layer region: -4.291,-0.205 -4.263,-0.207 -4.234,-0.211 -4.206,-0.216 -4.178,-0.223 -4.15,-0.231 -4.123,-0.241 -4.096,-0.252 -4.07,-0.264 -4.045,-0.278 -4.02,-0.293 -3.997,-0.309 -3.974,-0.327 -3.952,-0.345 -3.931,-0.365 -3.911,-0.386 -3.893,-0.408 -3.875,-0.431 -3.859,-0.454 -3.844,-0.479 -3.83,-0.504 -3.818,-0.53 -3.807,-0.557 -3.797,-0.584 -3.789,-0.612 -3.782,-0.64 -3.777,-0.668 -3.773,-0.697 -3.771,-0.725 -3.77,-0.754 -3.77,-1.354 -3.771,-1.383 -3.773,-1.411 -3.777,-1.44 -3.782,-1.468 -3.789,-1.496 -3.797,-1.524 -3.807,-1.551 -3.818,-1.578 -3.83,-1.604 -3.844,-1.629 -3.859,-1.654 -3.875,-1.677 -3.893,-1.7 -3.911,-1.722 -3.931,-1.743 -3.952,-1.763 -3.974,-1.781 -3.997,-1.799 -4.02,-1.815 -4.045,-1.83 -4.07,-1.844 -4.096,-1.856 -4.123,-1.867 -4.15,-1.877 -4.178,-1.885 -4.206,-1.892 -4.234,-1.897 -4.263,-1.901 -4.291,-1.903 -4.32,-1.904 -4.349,-1.903 -4.377,-1.901 -4.406,-1.897 -4.434,-1.892 -4.462,-1.885 -4.49,-1.877 -4.517,-1.867 -4.544,-1.856 -4.57,-1.844 -4.595,-1.83 -4.62,-1.815 -4.643,-1.799 -4.666,-1.781 -4.688,-1.763 -4.709,-1.743 -4.729,-1.722 -4.747,-1.7 -4.765,-1.677 -4.781,-1.654 -4.796,-1.629 -4.81,-1.604 -4.822,-1.578 -4.833,-1.551 -4.843,-1.524 -4.851,-1.496 -4.858,-1.468 -4.863,-1.44 -4.867,-1.411 -4.869,-1.383 -4.87,-1.354 -4.87,-0.754 -4.869,-0.725 -4.867,-0.697 -4.863,-0.668 -4.858,-0.64 -4.851,-0.612 -4.843,-0.584 -4.833,-0.557 -4.822,-0.53 -4.81,-0.504 -4.796,-0.479 -4.781,-0.454 -4.765,-0.431 -4.747,-0.408 -4.729,-0.386 -4.709,-0.365 -4.688,-0.345 -4.666,-0.327 -4.643,-0.309 -4.62,-0.293 -4.595,-0.278 -4.57,-0.264 -4.544,-0.252 -4.517,-0.241 -4.49,-0.231 -4.462,-0.223 -4.434,-0.216 -4.406,-0.211 -4.377,-0.207 -4.349,-0.205 -4.32,-0.204
  Bottom Layer region: 4.349,3.595 4.377,3.593 4.406,3.589 4.434,3.584 4.462,3.577 4.49,3.569 4.517,3.559 4.544,3.548 4.57,3.536 4.595,3.522 4.62,3.507 4.643,3.491 4.666,3.473 4.688,3.455 4.709,3.435 4.729,3.414 4.747,3.392 4.765,3.369 4.781,3.346 4.796,3.321 4.81,3.296 4.822,3.27 4.833,3.243 4.843,3.216 4.851,3.188 4.858,3.16 4.863,3.132 4.867,3.103 4.869,3.075 4.87,3.046 4.87,2.446 4.869,2.417 4.867,2.389 4.863,2.36 4.858,2.332 4.851,2.304 4.843,2.276 4.833,2.249 4.822,2.222 4.81,2.196 4.796,2.171 4.781,2.146 4.765,2.123 4.747,2.1 4.729,2.078 4.709,2.057 4.688,2.037 4.666,2.019 4.643,2.001 4.62,1.985 4.595,1.97 4.57,1.956 4.544,1.944 4.517,1.933 4.49,1.923 4.462,1.915 4.434,1.908 4.406,1.903 4.377,1.899 4.349,1.897 4.32,1.896 4.291,1.897 4.263,1.899 4.234,1.903 4.206,1.908 4.178,1.915 4.15,1.923 4.123,1.933 4.096,1.944 4.07,1.956 4.045,1.97 4.02,1.985 3.997,2.001 3.974,2.019 3.952,2.037 3.931,2.057 3.911,2.078 3.893,2.1 3.875,2.123 3.859,2.146 3.844,2.171 3.83,2.196 3.818,2.222 3.807,2.249 3.797,2.276 3.789,2.304 3.782,2.332 3.777,2.36 3.773,2.389 3.771,2.417 3.77,2.446 3.77,3.046 3.771,3.075 3.773,3.103 3.777,3.132 3.782,3.16 3.789,3.188 3.797,3.216 3.807,3.243 3.818,3.27 3.83,3.296 3.844,3.321 3.859,3.346 3.875,3.369 3.893,3.392 3.911,3.414 3.931,3.435 3.952,3.455 3.974,3.473 3.997,3.491 4.02,3.507 4.045,3.522 4.07,3.536 4.096,3.548 4.123,3.559 4.15,3.569 4.178,3.577 4.206,3.584 4.234,3.589 4.263,3.593 4.291,3.595 4.32,3.596
  Bottom Layer region: -4.291,3.595 -4.263,3.593 -4.234,3.589 -4.206,3.584 -4.178,3.577 -4.15,3.569 -4.123,3.559 -4.096,3.548 -4.07,3.536 -4.045,3.522 -4.02,3.507 -3.997,3.491 -3.974,3.473 -3.952,3.455 -3.931,3.435 -3.911,3.414 -3.893,3.392 -3.875,3.369 -3.859,3.346 -3.844,3.321 -3.83,3.296 -3.818,3.27 -3.807,3.243 -3.797,3.216 -3.789,3.188 -3.782,3.16 -3.777,3.132 -3.773,3.103 -3.771,3.075 -3.77,3.046 -3.77,2.446 -3.771,2.417 -3.773,2.389 -3.777,2.36 -3.782,2.332 -3.789,2.304 -3.797,2.276 -3.807,2.249 -3.818,2.222 -3.83,2.196 -3.844,2.171 -3.859,2.146 -3.875,2.123 -3.893,2.1 -3.911,2.078 -3.931,2.057 -3.952,2.037 -3.974,2.019 -3.997,2.001 -4.02,1.985 -4.045,1.97 -4.07,1.956 -4.096,1.944 -4.123,1.933 -4.15,1.923 -4.178,1.915 -4.206,1.908 -4.234,1.903 -4.263,1.899 -4.291,1.897 -4.32,1.896 -4.349,1.897 -4.377,1.899 -4.406,1.903 -4.434,1.908 -4.462,1.915 -4.49,1.923 -4.517,1.933 -4.544,1.944 -4.57,1.956 -4.595,1.97 -4.62,1.985 -4.643,2.001 -4.666,2.019 -4.688,2.037 -4.709,2.057 -4.729,2.078 -4.747,2.1 -4.765,2.123 -4.781,2.146 -4.796,2.171 -4.81,2.196 -4.822,2.222 -4.833,2.249 -4.843,2.276 -4.851,2.304 -4.858,2.332 -4.863,2.36 -4.867,2.389 -4.869,2.417 -4.87,2.446 -4.87,3.046 -4.869,3.075 -4.867,3.103 -4.863,3.132 -4.858,3.16 -4.851,3.188 -4.843,3.216 -4.833,3.243 -4.822,3.27 -4.81,3.296 -4.796,3.321 -4.781,3.346 -4.765,3.369 -4.747,3.392 -4.729,3.414 -4.709,3.435 -4.688,3.455 -4.666,3.473 -4.643,3.491 -4.62,3.507 -4.595,3.522 -4.57,3.536 -4.544,3.548 -4.517,3.559 -4.49,3.569 -4.462,3.577 -4.434,3.584 -4.406,3.589 -4.377,3.593 -4.349,3.595 -4.32,3.596
  Bottom Layer region: 4.349,-0.205 4.377,-0.207 4.406,-0.211 4.434,-0.216 4.462,-0.223 4.49,-0.231 4.517,-0.241 4.544,-0.252 4.57,-0.264 4.595,-0.278 4.62,-0.293 4.643,-0.309 4.666,-0.327 4.688,-0.345 4.709,-0.365 4.729,-0.386 4.747,-0.408 4.765,-0.431 4.781,-0.454 4.796,-0.479 4.81,-0.504 4.822,-0.53 4.833,-0.557 4.843,-0.584 4.851,-0.612 4.858,-0.64 4.863,-0.668 4.867,-0.697 4.869,-0.725 4.87,-0.754 4.87,-1.354 4.869,-1.383 4.867,-1.411 4.863,-1.44 4.858,-1.468 4.851,-1.496 4.843,-1.524 4.833,-1.551 4.822,-1.578 4.81,-1.604 4.796,-1.629 4.781,-1.654 4.765,-1.677 4.747,-1.7 4.729,-1.722 4.709,-1.743 4.688,-1.763 4.666,-1.781 4.643,-1.799 4.62,-1.815 4.595,-1.83 4.57,-1.844 4.544,-1.856 4.517,-1.867 4.49,-1.877 4.462,-1.885 4.434,-1.892 4.406,-1.897 4.377,-1.901 4.349,-1.903 4.32,-1.904 4.291,-1.903 4.263,-1.901 4.234,-1.897 4.206,-1.892 4.178,-1.885 4.15,-1.877 4.123,-1.867 4.096,-1.856 4.07,-1.844 4.045,-1.83 4.02,-1.815 3.997,-1.799 3.974,-1.781 3.952,-1.763 3.931,-1.743 3.911,-1.722 3.893,-1.7 3.875,-1.677 3.859,-1.654 3.844,-1.629 3.83,-1.604 3.818,-1.578 3.807,-1.551 3.797,-1.524 3.789,-1.496 3.782,-1.468 3.777,-1.44 3.773,-1.411 3.771,-1.383 3.77,-1.354 3.77,-0.754 3.771,-0.725 3.773,-0.697 3.777,-0.668 3.782,-0.64 3.789,-0.612 3.797,-0.584 3.807,-0.557 3.818,-0.53 3.83,-0.504 3.844,-0.479 3.859,-0.454 3.875,-0.431 3.893,-0.408 3.911,-0.386 3.931,-0.365 3.952,-0.345 3.974,-0.327 3.997,-0.309 4.02,-0.293 4.045,-0.278 4.07,-0.264 4.096,-0.252 4.123,-0.241 4.15,-0.231 4.178,-0.223 4.206,-0.216 4.234,-0.211 4.263,-0.207 4.291,-0.205 4.32,-0.204
  Bottom Layer region: -4.291,-0.205 -4.263,-0.207 -4.234,-0.211 -4.206,-0.216 -4.178,-0.223 -4.15,-0.231 -4.123,-0.241 -4.096,-0.252 -4.07,-0.264 -4.045,-0.278 -4.02,-0.293 -3.997,-0.309 -3.974,-0.327 -3.952,-0.345 -3.931,-0.365 -3.911,-0.386 -3.893,-0.408 -3.875,-0.431 -3.859,-0.454 -3.844,-0.479 -3.83,-0.504 -3.818,-0.53 -3.807,-0.557 -3.797,-0.584 -3.789,-0.612 -3.782,-0.64 -3.777,-0.668 -3.773,-0.697 -3.771,-0.725 -3.77,-0.754 -3.77,-1.354 -3.771,-1.383 -3.773,-1.411 -3.777,-1.44 -3.782,-1.468 -3.789,-1.496 -3.797,-1.524 -3.807,-1.551 -3.818,-1.578 -3.83,-1.604 -3.844,-1.629 -3.859,-1.654 -3.875,-1.677 -3.893,-1.7 -3.911,-1.722 -3.931,-1.743 -3.952,-1.763 -3.974,-1.781 -3.997,-1.799 -4.02,-1.815 -4.045,-1.83 -4.07,-1.844 -4.096,-1.856 -4.123,-1.867 -4.15,-1.877 -4.178,-1.885 -4.206,-1.892 -4.234,-1.897 -4.263,-1.901 -4.291,-1.903 -4.32,-1.904 -4.349,-1.903 -4.377,-1.901 -4.406,-1.897 -4.434,-1.892 -4.462,-1.885 -4.49,-1.877 -4.517,-1.867 -4.544,-1.856 -4.57,-1.844 -4.595,-1.83 -4.62,-1.815 -4.643,-1.799 -4.666,-1.781 -4.688,-1.763 -4.709,-1.743 -4.729,-1.722 -4.747,-1.7 -4.765,-1.677 -4.781,-1.654 -4.796,-1.629 -4.81,-1.604 -4.822,-1.578 -4.833,-1.551 -4.843,-1.524 -4.851,-1.496 -4.858,-1.468 -4.863,-1.44 -4.867,-1.411 -4.869,-1.383 -4.87,-1.354 -4.87,-0.754 -4.869,-0.725 -4.867,-0.697 -4.863,-0.668 -4.858,-0.64 -4.851,-0.612 -4.843,-0.584 -4.833,-0.557 -4.822,-0.53 -4.81,-0.504 -4.796,-0.479 -4.781,-0.454 -4.765,-0.431 -4.747,-0.408 -4.729,-0.386 -4.709,-0.365 -4.688,-0.345 -4.666,-0.327 -4.643,-0.309 -4.62,-0.293 -4.595,-0.278 -4.57,-0.264 -4.544,-0.252 -4.517,-0.241 -4.49,-0.231 -4.462,-0.223 -4.434,-0.216 -4.406,-0.211 -4.377,-0.207 -4.349,-0.205 -4.32,-0.204
  silkscreen extent -4.47,-3.65 4.47,-2.5

## Part data
C101 C102 C103 C201 C204 C205 C206 C207 C209 C211 C213 C215 C301 C302 C303 C305 C307 C310 C311 C312 C313: library part 0402c
C202 C203 C208 C210 C212 C214 C304 C306 C308 C309: library part 0603c
D101 D201: library part .LED
DNC1 DNC2 R208: library part 0805r
R101 R102 R103 R201 R202 R203 R204 R205 R206 R207 R209 R210 R211 R302: library part 0402r
SW101: library part .Button
SW301 SW302 SW303: library part TL3340AF160QG

## Nets (pads, with @x,y where several pads share a name; then routed paths per layer and width w, separated by ;. In a path a pad name is that pad's centre, name@x,y a point inside that pad or via, vN(x,y) a via of type N, cw(c..) or ccw(c..) an arc to the next point about the centre after c; other vN are vias at no path point)
1.8V: C212.2 C213.2 C301.2 C302.2 C303.2 C304.2 R101.2 R102.2 R207.1 R302.2 U101.A7 U101.B7 U102.03 U203.1 U301.5 U301.8 U301.12 U302.11
3.3V: C214.2 C215.2 C305.2 C306.2 R210.2 U203.4 U204.1 U302.9 U302.10 U304.07
32.768-1: C102.2 U101.C6 Y101.1
32.768-2: C103.2 U101.B6 Y101.2
GND: C101.2 C102.1 C103.1 C201.1 C202.1 C203.1 C204.1 C205.1 C206.1 C207.2 C208.1 C209.1 C210.1 C211.1 C212.1 C213.1 C214.1 C215.1 C301.1 C302.1 C303.1 C304.1 C305.1 C306.1 C307.1 C308.1 C309.2 C311.2 C312.2 C313.2 D101.K J201.A12 J201.B12 R202.2 R203.1 R204.1 R205.1 R206.1 R208.2 R209.1 SW101.B1 SW301.2 SW302.2 SW303.2 U101.A1 U101.A9 U101.B2 U101.B8 U101.E4 U101.E5 U101.F4 U101.F5 U101.K2 U101.K3 U101.K5 U101.K7 U101.K8 U101.L1 U101.L9 U101.M1 U101.M2 U101.M8 U101.M9 U102.04 U201.2 U202.6 U202.11 U203.2 U203.5 U204.2 U204.5 U301.1 U301.6 U301.7 U302.4 U302.12 U303.8 U304.06
MCULED: R103.1 U101.D2
NetC206_2: C206.2 J201.S1 J201.S2 J201.S3 J201.S4 R205.2
NetC208_2: C208.2 U202.7
NetC309_1: C309.1 U303.1
NetC310_1: C310.1 DNC2.1 U303.9
NetC310_2: C310.2 DNC1.1 U303.7
NetC311_1: C311.1 SW301.1 U101.C5
NetC312_1: C312.1 SW302.1 U101.B5
NetC313_1: C313.1 SW303.1 U101.H1
NetD101_A: D101.A R103.2
NetD201_K: D201.K R201.1
NetJ201_A5: J201.A5 R203.2
NetJ201_B5: J201.B5 R204.2
NetR201_2: R201.2 U201.1
NetR202_1: R202.1 U201.5
NetR206_2: R206.2 U202.9
NetR207_2: R207.2 U101.E2 U202.8
NetR210_1: R210.1 U203.3
NetR211_1: R211.1 U204.3
NetR302_1: R302.1 U101.A2 U302.13
NetU101_D1: U101.D1 U301.4
NetU101_D8: U101.D8 U304.01
NetU101_E8: U101.E8 U303.5
NetU101_F2: U101.F2 U301.9
NetU101_H7: U101.H7 U304.02
NetU101_H8: U101.H8 U304.04
NetU101_J8: U101.J8 U304.03
NetU101_J9: U101.J9 U304.05
nRESET: C101.1 SW101.A1 U101.J3
SCL: R101.1 U101.H3 U202.3 U301.13 U302.2 U303.2
SDA: R102.1 U101.G2 U202.4 U301.14 U302.3 U303.3
SWDCLK: U101.J2 U102.02
SWDIO: U101.H2 U102.01
USBC: C201.2 C202.2 C205.2 D201.A D202.A J201.A9 J201.B9 Q201.1 R209.2 U101.B9 U201.4
VBAT: C203.2 C204.2 C207.1 C209.2 C307.2 C308.2 J202.2 Q201.3 U101.A8 U201.3 U202.10 U303.6 U303.10
VNEG: J202.1 R208.1 U202.5
VSYS: C210.2 C211.2 D202.C Q201.2 R211.2 U204.4
pads on no net: DNC1.2 DNC2.2 J202.P1 J202.P2 SW101.A2 SW101.B2 SW301. SW301.3 SW301.S1 SW301.S2 SW302. SW302.3 SW302.S1 SW302.S2 SW303. SW303.3 SW303.S1 SW303.S2 U101.A3 U101.A4 U101.A5 U101.A6 U101.B1 U101.B3 U101.B4 U101.C1 U101.C2 U101.C4 U101.C8 U101.C9 U101.D3 U101.D7 U101.D9 U101.E1 U101.E3 U101.E7 U101.E9 U101.F1 U101.F3 U101.F7 U101.F8 U101.F9 U101.G1 U101.G3 U101.G4 U101.G5 U101.G7 U101.G8 U101.G9 U101.H9 U101.J1 U101.J4 U101.J5 U101.J7 U101.K1 U101.K9 U202.1 U202.2 U301.2 U301.3 U301.10 U301.11 U302.1 U302.5 U302.6 U302.7 U302.8 U302.14 U303.4

## Polygon pours and split planes (outlines as drawn)
no net on GND (split plane): 266 vertices, not listed, extent 2260.29,960.29 5369.71,4035.63
no net on PWR (split plane): 266 vertices, not listed, extent 2260.29,960.29 5369.71,4035.63

## Silkscreen, mask and mechanical layers (free items; w line width, h text height)
Board Outline:
  circle w10: c3815,2515 r1574.8

## Text inside footprints (layer, text, board x,y; h text height)
U101: Mechanical 13 "PCB Edge" at 3579.4,4041.45 h24 r90